# EAGLE board eagle board (EAGLE 8.2.0)
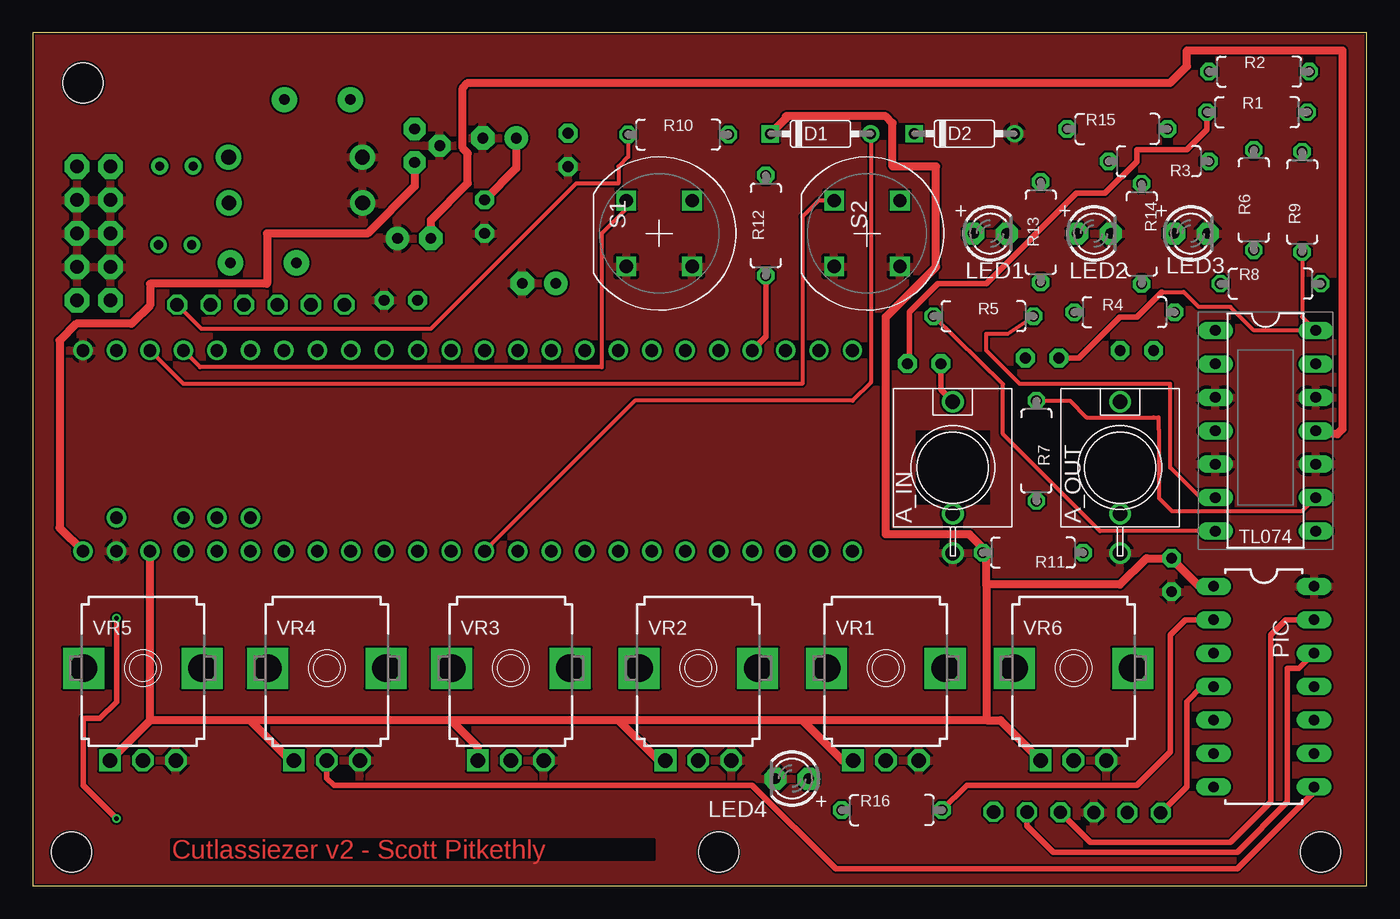
[diagram p0: board, top side]
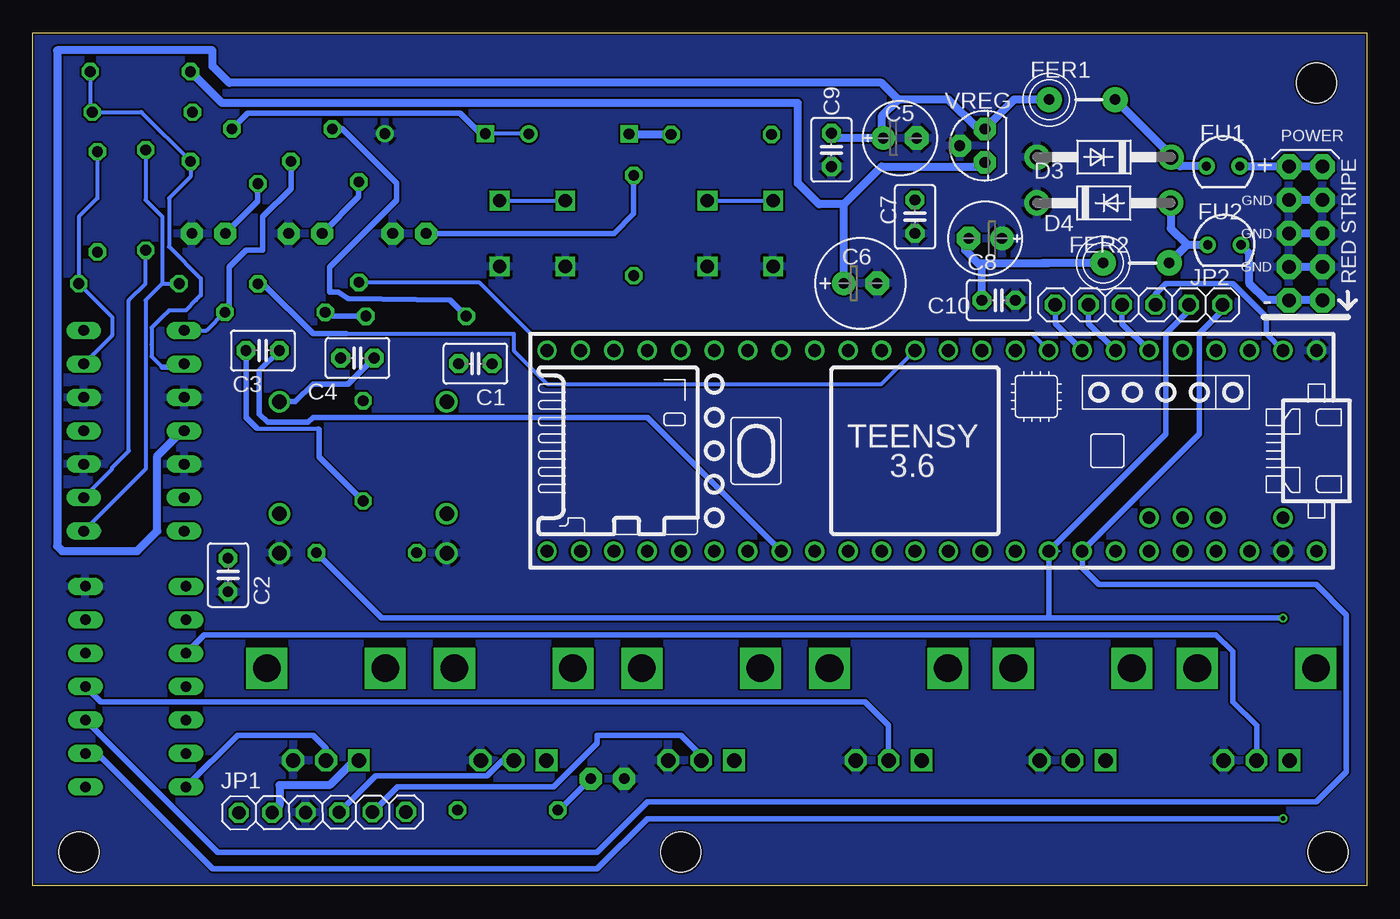
[diagram p1: board, bottom side, seen from below]

Size 101.27 x 64.76 mm. Coordinates in mm from the lower left corner, seen from the top.
Outline: 0,0 101.27,0 101.27,64.76 0,64.76 0,0
Copper layers (1*16): Top 0.035mm / dielectric 1.5mm / Bottom 0.035mm
Design rules "hackvana": minimum track width 6mil, minimum drill 0.3mm, track to track 6mil, track to pad 6mil, pad to pad 6mil, via to via 6mil, smd to smd 0mil, copper to edge 6mil, drill to drill 6mil, minimum pad ring 10mil, minimum via ring 6mil, stop-mask expansion 2mil, vias tented up to drill 100mil, thermal gap 10mil
Holes 3.05 mm at 3.81,60.96 52.07,2.54 2.92,2.54 97.79,2.54

## Footprints (pad centres in the part's own frame; a part is rotated, then mirrored left to right if it is on the bottom)
WQP-PJ301M-12_JACK = drill 1.1: P$1_TIP 0,5; P$2_SWITCH 0,-3.5; P$3_SLEEVE 0,-6.5
C025-030X050 = drill 0.813 pad 1.422 octagon: 1 -1.27,0; 2 1.27,0
E2,5-6E = drill 0.813 pad 1.778: + -1.27,0 | drill 0.813 pad 1.778 octagon: - 1.27,0
E2,5-7 = drill 0.813 pad 1.778: + -1.27,0 | drill 0.813 pad 1.778 octagon: - 1.27,0
DO35-7 = drill 0.813: A 3.81,0 | drill 0.813 square: C -3.81,0
DO41-10 = drill 1.118 pad 1.93: A 5.08,0; C -5.08,0
FB = drill 0.8 pad 1.93: P$1 -2.5,0; P$2 2.5,0
SOD70 = drill 0.7 pad 1.27: 1 -1.27,0; 2 1.27,0
1X06 = drill 1.016 octagon: 1 -6.35,0; 2 -3.81,0; 3 -1.27,0; 4 1.27,0; 5 3.81,0; 6 6.35,0
LED3MM = drill 0.813 pad 1.676 octagon: A -1.27,0; K 1.27,0
DIL14 = drill 0.813 long: 1 -8.89,-3.81; 2 -6.35,-3.81; 3 -3.81,-3.81; 4 -1.27,-3.81; 5 1.27,-3.81; 6 3.81,-3.81; 7 6.35,-3.81; 8 6.35,3.81; 9 3.81,3.81; 10 1.27,3.81; 11 -1.27,3.81; 12 -3.81,3.81; 13 -6.35,3.81; 14 -8.89,3.81
7MM_RESISTOR = drill 0.813 octagon: 1 -3.81,0; 2 3.81,0
D6_PUSH_SWITCH = drill 1 square: P$1 -2.5,2.5; P$2 2.5,2.5; P$3 2.5,-2.5; P$4 -2.5,-2.5
EURO_PWR_HEADER_FAT = drill 1.016 pad 1.88 octagon: 1 -5.08,-1.27; 2 -5.08,1.27; 3 -2.54,-1.27; 4 -2.54,1.27; 5 0,-1.27; 6 0,1.27; 7 2.54,-1.27; 8 2.54,1.27; 9 5.08,-1.27; 10 5.08,1.27
DIL14' = drill 0.813 long: 1 -7.62,-3.81; 2 -5.08,-3.81; 3 -2.54,-3.81; 4 0,-3.81; 5 2.54,-3.81; 6 5.08,-3.81; 7 7.62,-3.81; 8 7.62,3.81; 9 5.08,3.81; 10 2.54,3.81; 11 0,3.81; 12 -2.54,3.81; 13 -5.08,3.81; 14 -7.62,3.81
TEENSY_3.5/3.6_BASIC = drill 0.965: 0/RX -25.4,-7.62; 1/TX -22.86,-7.62; 2 -20.32,-7.62; 3/CANTX -17.78,-7.62; 3V3 7.62,-7.62; 3V3_LO -22.86,7.62; 4/CANRX -15.24,-7.62; 5 -12.7,-7.62; 6 -10.16,-7.62; 7 -7.62,-7.62; 8 -5.08,-7.62; 9/CS -2.54,-7.62; 10/CS 0,-7.62; 11/MOSI 2.54,-7.62; 12/MISO 5.08,-7.62; 13/SCK 5.08,7.62; 14/A0 2.54,7.62; 15/A1 0,7.62; 16/A2 -2.54,7.62; 17/A3 -5.08,7.62; 18/A4/SDA -7.62,7.62; 19/A5/SCL -10.16,7.62; 20/A6 -12.7,7.62; 21/A7 -15.24,7.62; 21/DAC0 12.7,7.62; 22/A8 -17.78,7.62; 23/A9 -20.32,7.62; 24 10.16,-7.62; 25 12.7,-7.62; 26 15.24,-7.62; 27 17.78,-7.62; 28 20.32,-7.62; 29 22.86,-7.62; 30 25.4,-7.62; 31/A12 27.94,-7.62; 32/A13 30.48,-7.62; 33/A14 30.48,7.62; 34/A15 27.94,7.62; 35/A16 25.4,7.62; 36/A17 22.86,7.62; 37/A18 20.32,7.62; 38/A19 17.78,7.62; 39/A20 15.24,7.62; A10 -17.78,5.08; A11 -15.24,5.08; A22/DAC1 10.16,7.62; AGND -25.4,7.62; AREF -20.32,5.08; GND -27.94,-7.62; GND2 7.62,7.62; VIN -27.94,7.62; VUSB -25.4,5.08
9MM_SNAP-IN_POT = drill 1.1 square: 1 -2.5,-7 | drill 1.1 octagon: 2 0,-7; 3 2.5,-7 | drill 2.1 square: CHASSIS1 -4.5,0; CHASSIS2 4.5,0
TO92 = drill 0.813 pad 1.676 octagon: 1 -1.27,0; 2 0,1.905; 3 1.27,0

## Placement (x,y rotation side)
A_IN  THONKICONNNEW  [WQP-PJ301M-12_JACK]  69.85,31.75 0 top
A_OUT  THONKICONNNEW  [WQP-PJ301M-12_JACK]  82.55,31.75 0 top
C1  0.1uF  [C025-030X050]  67.67,39.64 180 bottom
C2  0.1uF  [C025-030X050]  86.46,23.59 90 bottom
C3  0.1uF  [C025-030X050]  83.82,40.64 0 bottom
C4  10uF  [C025-030X050]  76.63,40.07 180 bottom
C5  10uF  [E2,5-6E]  35.43,56.77 0 bottom
C6  1uF  [E2,5-7]  38.43,45.75 0 bottom
C7  0.1uF  [C025-030X050]  34.29,50.8 270 bottom
C8  10uF  [E2,5-6E]  28.96,49.15 180 bottom
C9  0.1uF  [C025-030X050]  40.64,55.88 270 bottom
C10  0.1uF  [C025-030X050]  27.94,44.45 180 bottom
D1  [DO35-7]  59.81,57.09 0 top
D2  [DO35-7]  70.73,57.1 0 top
D3  1N4001  [DO41-10]  19.94,55.32 180 bottom
D4  1N4001  [DO41-10]  19.95,51.85 0 bottom
FER1  FB  [FB]  21.59,59.69 180 bottom
FER2  FB  [FB]  17.51,47.29 180 bottom
FU1  PTC-SOD70  [SOD70]  10.89,54.64 0 bottom
FU2  PTC-SOD70  [SOD70]  10.79,48.67 0 bottom
JP1  [1X06]  79.29,5.56 0.3 bottom
JP2  [1X06]  17.3,44.12 180 bottom
LED1  [LED3MM]  72.69,49.53 0 top
LED2  [LED3MM]  80.58,49.53 0 top
LED3  [LED3MM]  87.93,49.53 0 top
LED4  [LED3MM]  57.64,8.12 180 top
PIC  PIC16F1825DIL14  [DIL14]  93.47,13.84 270 top
R1  8.3k  [7MM_RESISTOR]  92.96,58.74 0 top
R2  8.3k  [7MM_RESISTOR]  93.11,61.82 0 top
R3  1k  [7MM_RESISTOR]  85.49,55.01 180 top
R4  100k  [7MM_RESISTOR]  82.89,43.55 180 top
R5  100k  [7MM_RESISTOR]  72.18,43.25 180 top
R6  100k  [7MM_RESISTOR]  92.71,52.07 90 top
R7  12k  [7MM_RESISTOR]  76.2,33.02 90 top
R8  100k  [7MM_RESISTOR]  93.98,45.72 0 top
R9  100k  [7MM_RESISTOR]  96.38,51.93 270 top
R10  4.7k  [7MM_RESISTOR]  49,57.04 0 top
R11  4.7k  [7MM_RESISTOR]  75.94,25.29 180 top
R12  1k  [7MM_RESISTOR]  55.65,50.14 270 top
R13  1k  [7MM_RESISTOR]  76.52,49.63 270 top
R14  1k  [7MM_RESISTOR]  84.19,49.5 270 top
R15  1k  [7MM_RESISTOR]  82.34,57.47 0 top
R16  1k  [7MM_RESISTOR]  65.22,5.74 0 top
S1  D6_PUSH_SWITCH  [D6_PUSH_SWITCH]  47.56,49.53 0 top
S2  D6_PUSH_SWITCH  [D6_PUSH_SWITCH]  63.34,49.53 0 top
SV1  EURO_POWER_HEADERFAT_PADS  [EURO_PWR_HEADER_FAT]  4.62,49.53 90 bottom
TL074  TL074_  [DIL14']  93.6,34.54 270 top
U$1  TEENSY_3.5/3.6_BASIC  [TEENSY_3.5/3.6_BASIC]  31.75,33.02 180 bottom
VR1  10K  [9MM_SNAP-IN_POT]  64.77,16.51 0 top
VR2  10K  [9MM_SNAP-IN_POT]  50.53,16.51 0 top
VR3  10K  [9MM_SNAP-IN_POT]  36.29,16.51 0 top
VR4  10K  [9MM_SNAP-IN_POT]  22.32,16.51 0 top
VR5  10K  [9MM_SNAP-IN_POT]  8.35,16.51 0 top
VR6  10K  [9MM_SNAP-IN_POT]  79.01,16.51 0 top
VREG  78L05Z  [TO92]  28.99,56.2 90 bottom

## Library data of the parts
A_IN A_OUT D1 D2 R1-R16 S1 S2 SV1 TL074 VR1-VR6 = MusicThingModular
C1-C10 D3 D4 FER1 FER2 JP1 JP2 LED1-LED4 VREG = adafruit
FU1 FU2 = ptc-ntc; OC_FARNELL: unknown; OC_NEWARK: unknown
PIC = jasons_stuff
U$1 = Teensy356

## Nets
3.3V: C2.2 D1.C JP1.2 PIC.1 R10.2 R11.2 U$1.3V3_LO VR1.1 VR2.1 VR3.1 VR4.1 VR5.1 VR6.1
5V: C6.+ R2.1 U$1.VIN VREG.1
+12V: C5.+ C7.1 C9.1 FER1.P$2 TL074.4 VREG.3
+12V_IN: FU1.2 SV1.9 SV1.10
-12V: C8.- C10.2 FER2.P$2 TL074.11
-12V_IN: FU2.2 SV1.1 SV1.2
A0: D1.A D2.C R15.2 U$1.14/A0
DAC0: C3.2 U$1.21/DAC0
GND: A_IN.P$3_SLEEVE A_OUT.P$3_SLEEVE C2.1 C5.- C6.- C7.2 C8.+ C9.2 C10.1 D2.A D3.A D4.C JP1.3 LED1.K LED2.K LED3.K LED4.K PIC.14 S1.P$3 S1.P$4 S2.P$3 S2.P$4 SV1.3 SV1.4 SV1.5 SV1.6 SV1.7 SV1.8 TL074.3 TL074.5 TL074.10 TL074.12 U$1.AGND U$1.GND VR1.3 VR2.3 VR3.3 VR4.3 VR5.3 VR6.3 VREG.2
MCLR: JP1.1 PIC.4
N$1: LED4.A R16.1
N$2: A_IN.P$1_TIP C1.2
N$3: R1.2 R2.2 R3.1 TL074.2
N$4: R3.2 R4.1 TL074.1
N$5: PIC.2 R16.2
N$6: R4.2 R5.1 TL074.6
N$7: C1.1 R1.1
N$8: R5.2 R15.1 TL074.7
N$9: LED1.A R12.1
N$10: PIC.11 VR3.2
N$11: PIC.8 VR4.2
N$12: PIC.3 VR5.2
N$13: C3.1 R7.1
N$14: R6.1 R7.2 TL074.9
N$15: PIC.7 VR6.2
N$16: R6.2 R8.1 TL074.8
N$17: R12.2 U$1.29
N$18: R8.2 R9.1 TL074.13
N$19: LED2.A R13.1
N$20: S1.P$1 S1.P$2 U$1.2
N$21: C4.2 R9.2 TL074.14
N$22: A_OUT.P$1_TIP C4.1
N$23: LED3.A R14.1
N$25: S2.P$1 S2.P$2 U$1.1/TX
N$26: R13.2 U$1.7
N$27: R14.2 U$1.11/MOSI
N$29: D3.C FER1.P$1 FU1.1
N$30: D4.A FER2.P$1 FU2.1
PGC: JP1.5 PIC.12 VR2.2
PGD: JP1.4 PIC.13 VR1.2
SCL: JP2.1 PIC.10 R10.1 U$1.19/A5/SCL
SDA: JP2.2 PIC.9 R11.1 U$1.18/A4/SDA
TP0: JP2.3 U$1.0/RX
TP4: JP2.4 U$1.4/CANRX
TP5: JP2.5 U$1.5
TP6: JP2.6 U$1.6

## Tracks (layer width: path | path; a pad name or v marks a point on that pad's centre or on a via)
3.3V
  Top 0.61: 8.89,12.55 U$1.3V3_LO | 8.89,12.55 VR5.1 | 16.51,12.55 8.89,12.55 | 31.75,12.55 16.51,12.55 | 44.45,12.55 31.75,12.55 | 58.42,12.55 44.45,12.55 | 72.39,12.55 58.42,12.55 | 72.39,12.55 73.47,12.55 VR6.1 | VR4.1 19.55,9.51 16.51,12.55 | VR3.1 33.79,10.51 31.75,12.55 | VR2.1 47.49,9.51 44.45,12.55 | VR1.1 61.46,9.51 58.42,12.55 | PIC.1 88.58,22.73 C2.2 84.55,24.86 82.55,22.86 72.39,22.86 | 72.39,22.86 72.39,25.03 R11.2 72.13,25.66 71.12,26.67 64.77,26.67 64.77,43.18 68.58,46.99 68.58,54.61 65.28,54.61 65.28,57.91 64.77,58.42 57.15,58.42 57.15,58.24 D1.C | 72.39,22.86 72.39,12.55
  Bottom 0.305: 55.95,57.04 D1.C
  Bottom 0.61: R10.2 55.95,57.04 | VR6.1 76.85,9.51 78.74,7.62 82.55,7.62 82.55,6.09 JP1.2
5V
  Top 0.61: VREG.1 28.99,53.12 25.4,49.53 17.78,49.53 17.78,45.72 8.89,45.72 8.89,44.07 7.49,42.67 3.3,42.67 2.03,41.4 2.03,27.18 U$1.VIN
  Bottom 0.61: C6.+ 39.7,51.74 | 39.7,51.74 36.83,54.61 29.3,54.61 VREG.1 | 39.7,51.74 41.58,51.74 43.18,53.34 43.18,59.44 86.92,59.44 R2.1
+12V
  Top 0.61: C5.+ 36.7,54.48 C7.1
  Bottom 0.61: FER1.P$2 26.77,59.69 VREG.3 29.53,57.47 31.75,59.69 35.56,59.69 | 35.56,59.69 36.83,58.42 36.83,56.9 C5.+ 40.26,56.77 C9.1 | 35.56,59.69 36.83,60.96 86.36,60.96 87.63,62.23 87.63,63.44 99.44,63.44 99.44,25.78 99.06,25.4 93.34,25.4 91.82,26.92 91.82,32.64 90.17,34.29 90.04,34.29 TL074.4
+12V_IN
  Bottom 0.61: SV1.9 SV1.10 9.59,54.61 FU1.2
-12V
  Top 0.61: C8.- 30.23,50.55 33.02,53.34 33.02,55.63 32.64,56.01 32.64,60.58 33.02,60.96 86.36,60.96 87.63,62.23 87.63,63.44 99.44,63.44 99.44,34.67 99.06,34.29 97.66,34.29 TL074.11
  Bottom 0.61: FER2.P$2 24.13,47.29 | 24.13,47.29 24.56,47.29 | 29.51,47.29 24.13,47.29 | 29.51,47.29 30.48,48.26 30.48,48.9 C8.- | C10.2 29.21,46.99 29.51,47.29
-12V_IN
  Bottom 0.61: SV1.1 SV1.2 7.62,44.45 8.89,45.72 8.89,48.04 FU2.2
A0
  Top 0.305: D1.A 63.62,38.22 62.23,36.83 45.72,36.83 U$1.14/A0
  Bottom 0.305: D1.A 66.9,57.09 D2.C
  Bottom 0.406: 67.27,57.1 D2.C 67.27,57.1 | 67.27,57.1 68.83,58.67 84.95,58.67 R15.2
DAC0
  Bottom 0.406: U$1.21/DAC0 54.61,35.56 80.01,35.56 80.37,35.2 83.46,35.2 84.07,35.81 84.07,39.12 C3.2
GND
  Bottom 0.61: SV1.7 SV1.8 | SV1.5 SV1.6 | SV1.3 SV1.4
  pour Top: -1.27,66.04 -1.27,-1.27 102.87,-1.27 102.87,64.77 102.87,66.04
  pour Bottom: -2.54,66.04 -2.54,-2.54 104.14,-2.54 104.14,66.04
MCLR
  Top 0.406: PIC.4 88.77,15.11 87.63,13.97 87.63,7.52 JP1.1
N$1
  Bottom 0.406: R16.1 61.29,5.74 LED4.A
N$2
  Top 0.406: A_IN.P$1_TIP 68.94,37.66 C1.2
N$3
  Bottom 0.305: R2.2 96.92,58.89 R1.2 93.03,58.74 R3.1 89.3,53.83 90.93,52.2 90.93,48.51 88.52,46.1 88.52,44.83 88.9,44.45 89.66,43.69 90.93,43.69 91.44,43.18 92.25,42.37 92.25,41.1 92.25,40.18 91.44,39.37
  Bottom 0.406: 91.44,39.37 90.04,39.37 TL074.2
N$4
  Bottom 0.305: TL074.1 88.08,42.16 R4.1
  Bottom 0.406: R3.2 81.68,52.94 83.82,50.8 83.82,48.26 85.09,48.26 86.36,46.99 86.36,43.88 R4.1
N$5
  Top 0.406: PIC.2 87.5,20.19 86.36,19.05 86.36,10.16 83.82,7.62 70.91,7.62 R16.2
N$6
  Top 0.305: TL074.6 88.65,29.46 86.36,31.75 86.36,38.1 74.93,38.1 72.39,40.64 72.39,41.91 74.02,41.91 R5.1
  Bottom 0.406: R5.1 78.77,43.25 R4.2
N$7
  Top 0.406: R1.1 89.15,57.4 87.63,55.88 83.82,55.88 83.82,54.99 81.41,52.58 79.25,52.58 72.39,45.72 68.71,45.72 66.55,43.56 66.55,39.79 C1.1
N$8
  Top 0.305: TL074.7 81.03,26.92 73.66,34.29 73.66,38.09 R5.2
  Bottom 0.406: R15.1 77.79,57.47 73.66,53.34 73.66,52.07 78.74,46.99 78.74,45.09 78.11,45.09 77.34,44.58 69.58,44.45 R5.2
N$9
  Bottom 0.406: R12.1 55.65,51.03 57.15,49.53 LED1.A
N$10
  Bottom 0.406: VR3.2 36.29,12.16 38.1,13.97 96.14,13.97 PIC.11
N$11
  Top 0.406: VR4.2 22.32,8.16 22.86,7.62 54.61,7.62 60.96,1.27 91.44,1.27 97.79,7.62 97.41,7.62 PIC.8
N$12
  Bottom 0.406: VR5.2 8.35,12.16 10.16,13.97 10.16,17.78 11.43,19.05 88.27,19.05 PIC.3
N$13
  Bottom 0.305: 79.61,34.69 84.22,34.69 84.28,34.75
  Bottom 0.406: 79.61,34.69 79.55,34.63 79.55,32.56 R7.1 | 84.28,34.75 85.09,35.56 C3.1
N$14
  Top 0.305: R7.2 78.74,36.83 80.01,35.56 85.09,35.56 85.47,35.56 85.47,34.65 85.5,34.61 85.5,29.43 86.49,28.45 96.39,28.45 TL074.9
  Bottom 0.305: R6.1 92.71,45.72 93.98,44.45 93.98,33.02 95.25,31.75 95.25,31.62 TL074.9
N$15
  Bottom 0.406: VR6.2 79.01,10.43 80.01,11.43 85.72,11.43 PIC.7
N$16
  Bottom 0.305: 91.44,45.72 R8.1 | 91.44,45.72 92.71,44.45 92.71,31.62 TL074.8 | R6.2 92.71,52.07 91.44,50.8 91.44,45.72
  Bottom 0.406: TL074.8 96.27,26.92
N$17
  Top 0.406: R12.2 55.65,41.68 U$1.29
N$18
  Bottom 0.305: R9.1 96.38,52.21 97.79,50.8 R8.2 95.25,43.18 95.25,41.78 TL074.13
N$19
  Bottom 0.406: R13.1 76.52,52.32 LED2.A
N$20
  Top 0.305: S1.P$1 45.06,51.41 43.18,49.53 43.18,39.37 12.7,39.37 U$1.2
  Bottom 0.305: S1.P$2 S1.P$1
N$21
  Top 0.305: R9.2 96.38,43.19 TL074.14 92.71,42.16 90.93,43.94 88.52,43.94 87.38,45.09 85.72,45.09
  Top 0.406: 85.72,45.09 83.82,43.18 82.55,43.18 80.01,40.64 79.44,40.07 C4.2
N$22
  Bottom 0.406: A_OUT.P$1_TIP 81.36,36.75 80.01,38.1 77.33,38.1 C4.1
N$23
  Bottom 0.406: R14.1 84.19,52 LED3.A
N$25
  Top 0.305: S2.P$1 59.65,52.03 58.42,50.8 58.42,38.1 11.43,38.1 U$1.1/TX
  Bottom 0.305: S2.P$2 S2.P$1
N$26
  Bottom 0.305: R13.2 67.41,45.82 63.5,41.91 25.4,41.91 U$1.7
N$27
  Bottom 0.305: 77.47,41.91 64.77,41.91 64.77,40.64 62.23,38.1 36.83,38.1 U$1.11/MOSI
  Bottom 0.406: R14.2 83.79,45.69 80.01,41.91 77.47,41.91
N$29
  Bottom 0.61: FU1.1 14.17,54.64 D3.C 14.86,55.46 FER1.P$1
N$30
  Bottom 0.61: 13.63,48.67 FU2.1 | 13.63,48.67 FER2.P$1 | D4.A 14.88,49.91 13.63,48.67
PGC
  Top 0.406: PIC.12 96.14,16.51 95.25,16.51 95.25,6.35 91.44,2.54 77.47,2.54 75.48,4.53 JP1.5 | JP1.5
  Bottom 0.152: 50.53,9.16 VR2.2
  Bottom 0.406: VR2.2 50.53,9.89 52.07,11.43 58.42,11.43 58.42,10.8 61.72,7.49 73.57,7.49 JP1.5
PGD
  Top 0.406: PIC.13 95.12,20.19 93.98,19.05 93.98,6.35 90.93,3.3 80.29,3.3 JP1.4
  Bottom 0.406: VR1.2 65.6,9.51 66.78,8.33 75.26,8.33 JP1.4
SCL
  Top 0.305: R10.1 45.19,55.35 44.45,54.61 44.45,53.34 41.27,53.34 30.23,42.29 12.78,42.29 JP2.1
  Bottom 0.406: PIC.10 87.25,2.54 58.42,2.54 54.61,6.35 3.81,6.35 1.52,8.64 1.52,20.57 3.81,22.86 20.32,22.86 21.59,24.13 U$1.19/A5/SCL 12.7,34.29 12.7,41.91 10.95,43.66 JP2.1
SDA  (via drill 0.35)
  Top 0.406: 79.9,25.29 R11.1 | v6.35,5.08 3.81,7.62 3.81,12.7 5.08,12.7 6.35,13.97 v6.35,20.32
  Bottom 0.152: U$1.18/A4/SDA 23.29,25.4
  Bottom 0.406: PIC.9 96.39,10.03 87.63,1.27 58.42,1.27 54.61,5.08 v6.35,5.08 | 24.13,20.32 v6.35,20.32 | 24.13,20.32 74.78,20.32 R11.1 | 24.13,20.32 U$1.18/A4/SDA 15.24,34.29 15.24,41.91 13.49,43.66 JP2.2
TP0
  Bottom 0.406: JP2.3 16.03,44.93 15.24,45.72 10.16,45.72 7.62,43.18 7.62,41.91 U$1.0/RX
TP4
  Bottom 0.406: JP2.4 18.57,42.7 U$1.4/CANRX
TP5
  Bottom 0.406: JP2.5 21.11,42.7 U$1.5
TP6
  Bottom 0.406: JP2.6 23.65,42.7 U$1.6

## Text on the board
Top: Cutlassiezer v2 - Scott Pitkethly